# Altium PCB PCB1.PcbDoc
Units mm, origin at the board's own origin, x right, y up, seen from the top; angles counter-clockwise.
Board outline 19.81 x 14.86 mm, 2 copper layers (Top Layer, Bottom Layer); 10 components, 9 nets, 51 pads, 10 vias.
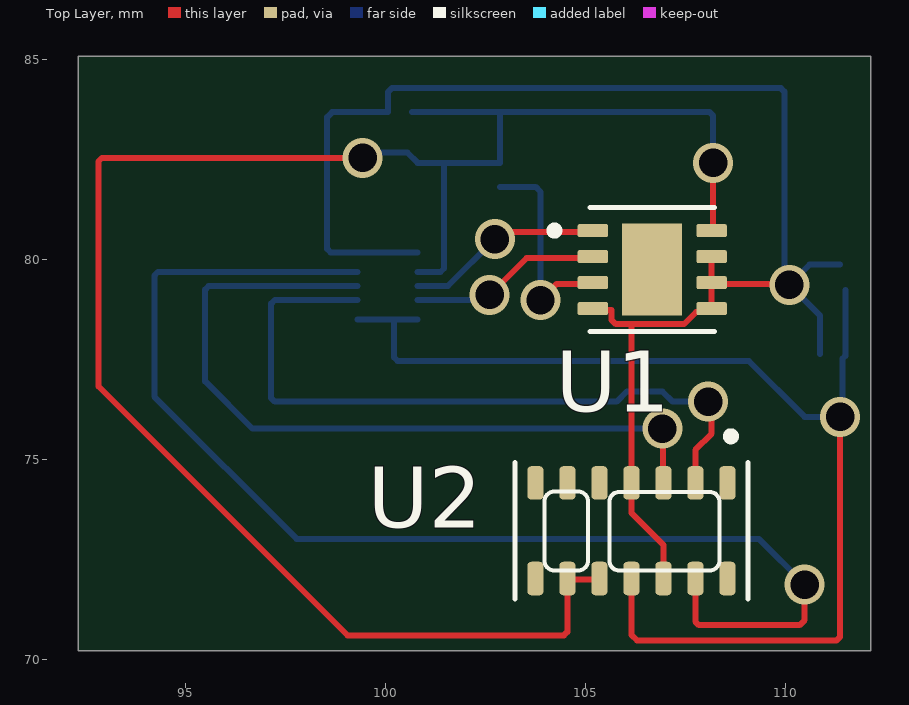
[diagram p0: Top Layer view]
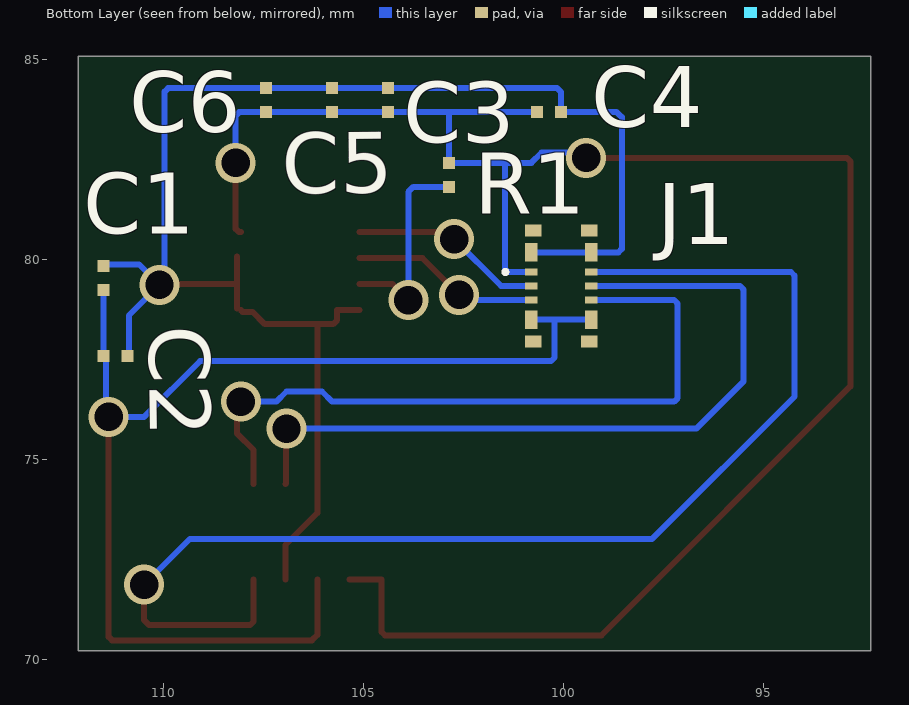
[diagram p1: Bottom Layer view, seen from below]
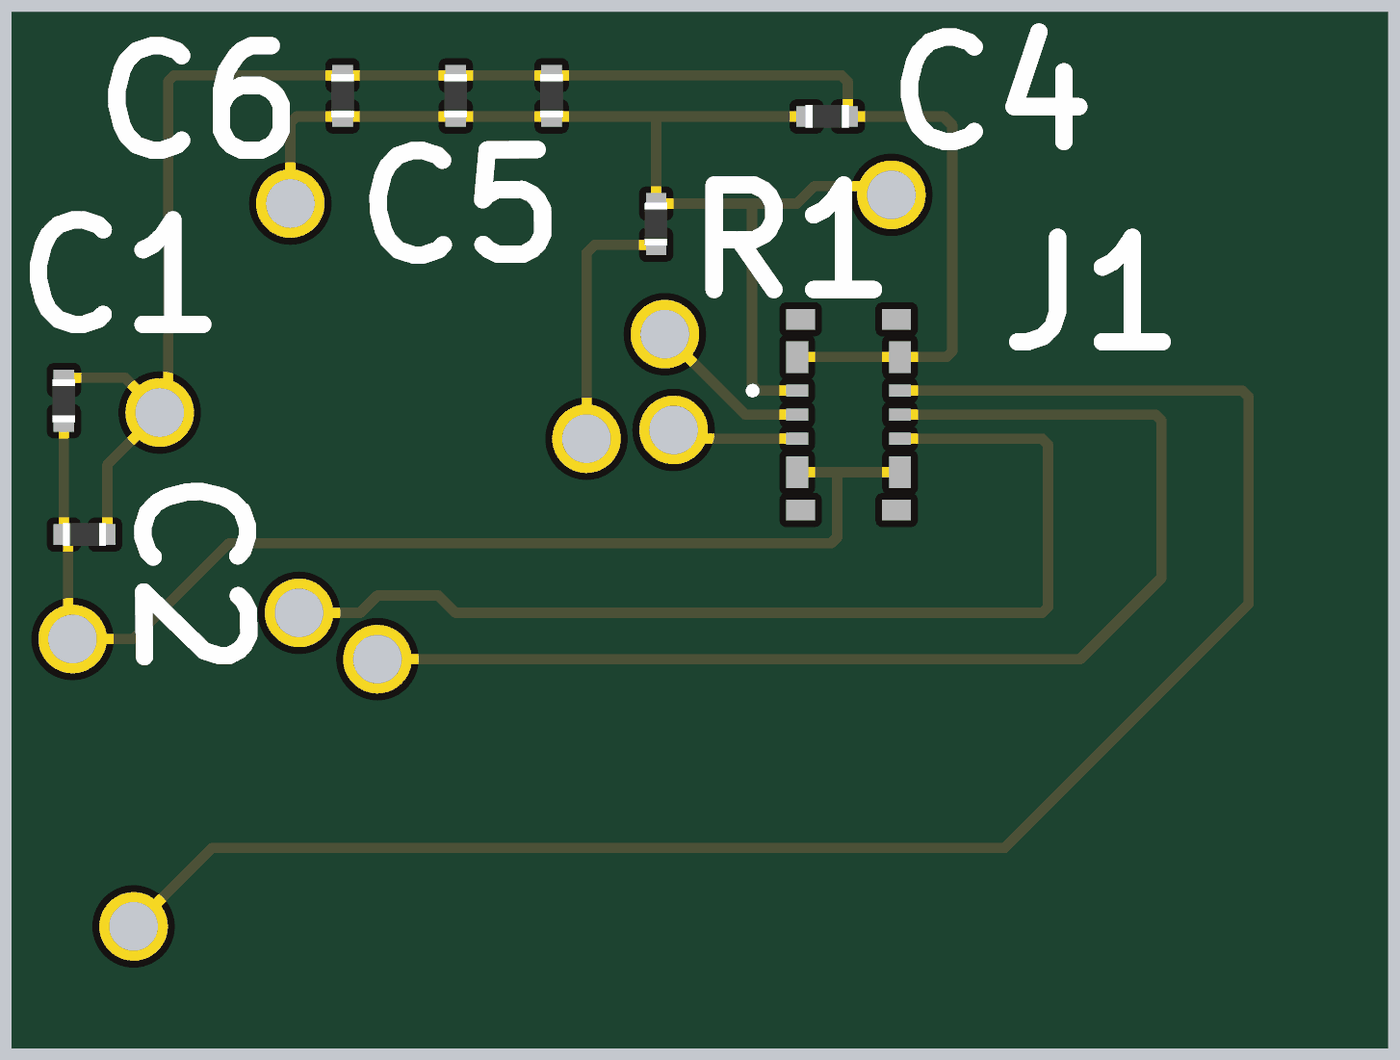
[diagram p2: 3D render of the assembled board from below, using the file's embedded part models]

## Layer stack, top to bottom
Top Solder: solder mask 0.0102, Solder Resist, Dk 3.5
Top Layer: signal copper 0.0356
Dielectric 1: dielectric 0.32, FR-4, Dk 4.8
Bottom Layer: signal copper 0.0356
Bottom Solder: solder mask 0.0102, Solder Resist, Dk 3.5

## Board outline
92.329,70.231 112.141,70.231 112.141,85.09 92.329,85.09

## Design rules (kind name [scope] priority, off if disabled: settings)
Clearance [All] p1: gap=0.1 ignorepadtopadclearanceinfootprint=FALSE
HoleSize [All] p1: absolutevalues=TRUE maxlimit=2.54 minlimit=0.15 maxpercent=80.000 minpercent=20.000
HoleToHoleClearance [All] p1: gap=0.2 allowstackedmicrovias=TRUE
PolygonConnect [All] p1: connectstyle=Relief reliefconductorwidth=0.254 reliefentries=4 polygonreliefangle="90 Angle" airgapwidth=0.254
RoutingVias [All] p1: holewidth=0.15 width=0.25 viastyle="Through Hole" minholewidth=0.1 minwidth=0.2 maxholewidth=0.3 maxwidth=1.2
SolderMaskExpansion [All] p1: expansion=0.102 istentingtop=FALSE
SupplyNets "Schematic Supply Nets_2" [InNet('3V3')] p1: voltage=0.000
SupplyNets "Schematic Supply Nets_1" [InNet('1V8')] p2: voltage=0.000
SupplyNets "Schematic Supply Nets" [InNet('GND')] p3: voltage=0.000
Width [All] p1: maxlimit=0.5 minlimit=0.1 preferedwidth=0.15
28 further rules are at their usual default settings.

## Components (designator, comment, footprint, x,y, rotation, side; value= is the part's Value field where it differs from the comment)
C1 "02016D475MAT2A" Chip2PinSM127P600-8N 111.206,77.597 r0 bottom value=4.7µF
C2 "0402YC104JAT4A" Chip2PinSM127P600-8N 111.506,79.548 r270 bottom value=100nF
C3 "0402ZD106MAT2A" Chip2PinSM127P600-8N 104.394,83.993 r270 bottom value=10µF
C4 "0402YC104JAT4A" Chip2PinSM127P600-8N 100.376,83.693 r0 bottom value=100nF
C5 "0402ZD106MAT2A" Chip2PinSM127P600-8N 105.791,83.993 r90 bottom value=10µF
C6 "0402YC104JAT4A" Chip2PinSM127P600-8N 107.442,83.993 r90 bottom value=100nF
J1 "Connector socket" BM29B066DS2035V53 100.064,79.344 r270 bottom
R1 "CR0201-JW-472GLF" Chip2PinSM127P600-8N 102.87,82.123 r90 bottom value=4.7k
U1 "TEMP" SON65P300X300X80-9N 106.68,79.756 r0 top
U2 "PPG" PSON80P560X330X165-14N 106.159,73.227 r270 top

## Footprints (in the part's own frame and the unit in brackets; to place one, negate y for a bottom-side part, rotate by r counter-clockwise, add the part's x,y. Pads: shape width x height; smd on the part's side, far side on the other; paste and mask are expansions set on the pad)
BM29B066DS2035V53 [mm]
  rect 0.18x0.32 smd: 1(-0.35,-0.75) 2(-0.35,0.75) 3(0,-0.75) 4(0,0.75) 5(0.35,-0.75) 6(0.35,0.75)
  rect 0.46x0.32 smd: MP1(-0.84,-0.75) MP2(-0.84,0.75) MP3(0.84,-0.75) MP4(0.84,0.75)
  rect 0.3x0.42 smd: MP5(-1.39,-0.7) MP6(-1.39,0.7) MP7(1.39,-0.7) MP8(1.39,0.7)
  silkscreen extent -0.4,-1.45 -0.3,-1.35
Chip2PinSM127P600-8N [mm]
  rect 0.3x0.3 smd: 1(-0.3,0) 2(0.3,0)
  body extent -0.32,-0.17 0.32,0.17, height 0.26
PSON80P560X330X165-14N [mm]
  rrect50% 0.84x0.4 smd: 1(-1.195,2.4) 2(-1.195,1.6) 3(-1.195,0.8) 4(-1.195,0) 5(-1.195,-0.8) 6(-1.195,-1.6) 7(-1.195,-2.4) 8(1.195,-2.4) 9(1.195,-1.6) 10(1.195,-0.8) 11(1.195,0) 12(1.195,0.8) 13(1.195,1.6) 14(1.195,2.4)
  silkscreen extent -2.46,-2.91 1.7,2.91
SON65P300X300X80-9N [mm]
  rrect25% 0.76x0.32 smd: 1(-1.485,0.975) 2(-1.485,0.325) 3(-1.485,-0.325) 4(-1.485,-0.975) 5(1.485,-0.975) 6(1.485,-0.325) 7(1.485,0.325) 8(1.485,0.975)
  rect 1.5x2.3 smd paste-2: 9(0,0)
  silkscreen extent -2.54,-1.55 1.55,1.55, body extent -1.5,-1.5 1.5,1.5, height 0.8

## Part data
C1: library part CMP-001-00098-5, "Condensatori in ceramica multistrato MLCC - SMD/SMT 6.3V 4.7uF X5R 0201 20%", Manufacturer="Kyocera AVX", Manufacturer Part Number=CM03X5R475M06AH055, Max Operating Temperature=85°C, Min Operating Temperature=-55°C, Tolerance=20%, Component Type=Capacitors, ComponentLink1Description="New link", Mounting Technology="Surface Mount", RoHS Compliant=Yes, Supplier 1=Avnet, Supplier Part Number 1=02016D475MAT2A
C2 C4 C6: library part CMP-00047-1, "Ceramic Capacitor, Multilayer, Ceramic, 16V, 5% +Tol, 5% -Tol, X7R, 15% TC, 0.1uF, Surface Mount, 0402", Capacitor Type=Ceramic, Case/Package=0402, Manufacturer="KYOCERA AVX", Max Operating Temperature=125°C, Min Operating Temperature=-55°C, Package Shape=Rectangular, Package Style=SMTMeter, Rated DC Voltage (URdc)=16V, Supplier Part Number 1=KGM05AR71C104JN, Temperature Characteristics Code=X7R, Tolerance  (fill in as +-)=5%, Component Type=Capacitors, Dielectric Material=Ceramic, Height=0.56mm, JESD-609 Code=e3, Length=1mm, Manufacturer Part Number=0402YC104JAT4A, Mounting Technology="Surface Mount", Multilayer=Yes, Packaging="Tape and Reel", Pins=2, Reach SVHC Compliant=Yes, RoHS Compliant=Yes, Supplier 1=Avnet, Terminal Finish=Nickel, Termination=Wraparound, Tolerance (fill in as +-)=5%, Width=0.5mm
C3 C5: library part CMP-00044-1, "Ceramic Capacitor, Multilayer, Ceramic, 10V, 20% +Tol, 20% -Tol, X5R, 15% TC, 10uF, Surface Mount, 0402", Capacitor Type=Ceramic, Case/Package=0402, Manufacturer="KYOCERA AVX", Max Operating Temperature=85°C, Min Operating Temperature=-55°C, Package Shape=Rectangular, Rated DC Voltage (URdc)=10V, Supplier Part Number 1=3092588, Temperature Characteristics Code=X5R, Tolerance  (fill in as +-)=20%, Component Type=Capacitors, Dielectric Material=Ceramic, JESD-609 Code=e3, Manufacturer Part Number=0402ZD106MAT2A, Mounting Technology="Surface Mount", Multilayer=Yes, Packaging="Tape and Reel", Pins=2, Reach SVHC Compliant=Yes, RoHS Compliant=Yes, Supplier 1="Future Electronics", Terminal Finish=Nickel, Termination=Wraparound, Tolerance (fill in as +-)=20%
J1: library part BM29B0.6-6DS_2-0.35V_53_, "FFC & FPC Connectors", Manufacturer_Name=Hirose, Manufacturer_Part_Number=BM29B0.6-6DS/2-0.35V(53), Mouser Part Number=798-29B066DS/2035V53, Supplier Part Number 1=26-BM29B-6DP/2-0.35V(53)CT-ND, Datasheet Link=https://www.hirose.com/en/product/document?clcode=CL0673-7003-0-53&productname=BM29B0.6-6DS%2f2-0.35V(53)&series=BM29&documenttype=2DDrawing&lang=en&documentid=0001443321, Geometry.Height=0.7mm, Mouser Price/Stock=https://www.mouser.co.uk/ProductDetail/Hirose-Connector/BM29B06-6DS-2-035V53?qs=vmHwEFxEFR%2FomrU63aDooQ%3D%3D, Supplier 1=DigiKey
R1: library part CMP-00117-1, "Fixed Resistor, Metal Glaze/thick Film, 0.05W, 4700ohm, 30V, 5% +/-Tol, 200ppm/Cel, Surface Mount, 0201", Case/Package=0201, Manufacturer=Bourns, Max Operating Temperature=125°C, Min Operating Temperature=-55°C, Package Height=0.23mm, Package Length=0.6mm, Package Shape=Rectangular, Package Style=SMTMeter, Package Width=0.3mm, Power=50mW, Rated Temperature=70°C, Resistor Type="FIXED RESISTOR", Supplier Part Number 1=118-CR0201-JW-472GLFCT-ND, Temperature Coefficient=200ppm/°C, Tolerance=5%, Working Voltage=25V, Component Type=Resistors, Construction=Chip, JESD-609 Code=e3, Manufacturer Part Number=CR0201-JW-472GLF, Mounting Technology="Surface Mount", Packaging="Tape and Reel", Pins=2, Reach SVHC Compliant=Yes, RoHS Compliant=Yes, Supplier 1=DigiKey, Technology="RUTHENIUM OXIDE", Terminal Finish=Nickel, Termination=Wraparound
U1: library part MAX30205MTA+T, "Human Body Temperature Sensor", Package="TDFN-EP-8 Maxim", Supplier Part Number 1=3921729, Check_prices=https://www.snapeda.com/parts/MAX30205MTA+T/Analog+Devices/view-part/?ref=eda, MF="Analog Devices", MP=MAX30205MTA+T, SnapEDA_Link=https://www.snapeda.com/parts/MAX30205MTA+T/Analog+Devices/view-part/?ref=snap, Supplier 1=Farnell
U2: library part MAX30101EFD+T, "Pulse Oximeter and Heart Rate Sensor Digital Output 1.8V 14-Pin OLGA T/R", Package=None, Supplier Part Number 1=3596283, Check_prices=https://www.snapeda.com/parts/MAX30101EFD+T/Maxim+Integrated/view-part/?ref=eda, Digi-Key_Part_Number=MAX30101EFD+TTR-ND, MF="Maxim Integrated Products", MP=MAX30101EFD+T, Purchase-URL=https://pricing.snapeda.com/search/part/MAX30101EFD+T/?ref=eda, SnapEDA_Link=https://www.snapeda.com/parts/MAX30101EFD+T/Maxim+Integrated/view-part/?ref=snap, Supplier 1=Farnell

## Via types
v1: diameter 1, hole 0.711, Top Layer to Bottom Layer, 10 vias

## Nets (pads, with @x,y where several pads share a name; then routed paths per layer and width w, separated by ;. In a path a pad name is that pad's centre, name@x,y a point inside that pad or via, vN(x,y) a via of type N, cw(c..) or ccw(c..) an arc to the next point about the centre after c; other vN are vias at no path point)
1V8: C1.2 C2.2 J1.MP3 J1.MP4 U2.11 | length 29.6
  Top Layer w0.15: U2.11@106.159,72.009 106.159,70.625 106.299,70.485 111.291,70.485 111.379,70.573 v1(111.379,76.073)
  Bottom Layer w0.15: J1.MP4 100.229,78.504 J1.MP3 ; 100.229,78.504 100.229,77.558 100.317,77.47 109.093,77.47 110.49,76.073 v1(111.379,76.073) 111.442,76.136 111.442,77.534 C1.2 C2.2
3V3: C3.2 C4.2 C5.1 C6.1 J1.1 R1.2 U1.8 U2.9 U2.10 | length 47.5
  Top Layer w0.15: v1(99.441,82.55) 92.925,82.55 92.837,82.462 92.837,76.835 99.06,70.612 104.471,70.612 104.559,70.7 104.559,72.009 U2.10@105.359,72.009 ; U1.8@108.077,80.69 108.119,80.69 108.204,80.775 v1(108.204,82.423)
  Bottom Layer w0.15: v1(99.441,82.55) 99.568,82.677 100.56,82.677 100.814,82.423 101.473,82.423 ; C4.2 102.87,83.693 ; J1.1 101.385,79.694 101.473,79.782 101.473,82.423 ; v1(108.204,82.423) 108.204,83.605 108.116,83.693 C6.1 C5.1 C3.2 102.87,83.693 ; 101.473,82.423 R1.2 102.87,83.693
GND: C1.1 C2.1 C3.1 C4.1 C5.2 C6.2 J1.MP1 J1.MP2 U1.4 U1.5 U1.6 U1.7 U2.4 U2.12 | length 39.4
  Top Layer w0.15: U1.4@105.107,78.74 105.667,78.74 105.667,78.493 105.77,78.39 106.172,78.39 ; U2.12@106.959,72.009 106.959,72.873 106.159,73.673 106.159,74.399 106.159,78.377 106.172,78.39 ; U1.5@108.077,78.74 108.033,78.696 107.779,78.696 107.473,78.39 106.172,78.39 ; U1.5 108.165,79.39 110.094,79.39 v1(110.109,79.375) ; U1.6 U1.7
  Bottom Layer w0.15: J1.MP1 J1.MP2 98.64,80.184 98.552,80.272 98.552,83.566 98.679,83.693 C4.1 100.076,84.201 100.168,84.293 C3.1 C5.2 C6.2 109.894,84.293 109.982,84.205 109.982,79.502 v1(110.109,79.375) ; C1.1@110.871,77.646 110.871,78.613 v1(110.109,79.375) ; C2.1@111.373,79.883 110.617,79.883 v1(110.109,79.375)
"I2C3 SCL 1V8": J1.6 U2.2 | length 18
  Top Layer w0.15: U2.2@107.759,74.399 107.759,75.247 108.166,75.654 108.166,76.365 v1(108.077,76.454)
  Bottom Layer w0.15: J1.6 97.243,78.994 97.155,78.906 97.155,76.542 97.243,76.454 105.791,76.454 106.045,76.708 106.934,76.708 107.188,76.454 v1(108.077,76.454)
"I2C3 SCL 3V3": J1.5 U1.2 | length 4.7
  Top Layer w0.15: v1(102.616,79.121) 103.535,80.04 U1.2@105.107,80.04
  Bottom Layer w0.15: J1.5 102.489,78.994 v1(102.616,79.121)
"I2C3 SDA 1V8": J1.4 U2.3 | length 19.5
  Top Layer w0.15: v1(106.934,75.779) 106.946,75.767 106.946,74.411 U2.3@106.959,74.399
  Bottom Layer w0.15: J1.4 95.592,79.344 95.504,79.256 95.504,76.962 96.687,75.779 v1(106.934,75.779)
"I2C3 SDA 3V3": J1.3 U1.1 | length 4.9
  Top Layer w0.15: v1(102.743,80.518) 102.915,80.69 U1.1@105.107,80.69
  Bottom Layer w0.15: J1.3 101.569,79.344 v1(102.743,80.518)
INT: J1.2 U2.13 | length 31.1
  Top Layer w0.15: U2.13@107.759,72.009 107.759,70.954 107.847,70.866 110.366,70.866 110.49,70.99 v1(110.49,71.882)
  Bottom Layer w0.15: J1.2 94.322,79.694 94.234,79.606 94.234,76.581 97.79,73.025 109.347,73.025 v1(110.49,71.882)
OS: R1.1 U1.3 | length 5.2
  Top Layer w0.15: v1(103.886,78.994) 104.282,79.39 U1.3@105.107,79.39
  Bottom Layer w0.15: R1.1 103.763,81.823 103.886,81.7 v1(103.886,78.994)
pads on no net: J1.MP5 J1.MP6 J1.MP7 J1.MP8 U1.9 U2.1 U2.5 U2.6 U2.7 U2.8 U2.14

## Silkscreen, mask and mechanical layers (free items; w line width, h text height)
Board:
  the board outline again, w0.254